# Altium PCB PCB1.PcbDoc
Units mil, origin at the board's own origin, x right, y up, seen from the top; angles counter-clockwise.
Board outline 3415.5 x 2835 mil, 2 copper layers (Top Layer, Bottom Layer); 34 components, 28 nets, 146 pads, 11 vias.
Unrouted connection lines stored in the file: 71.
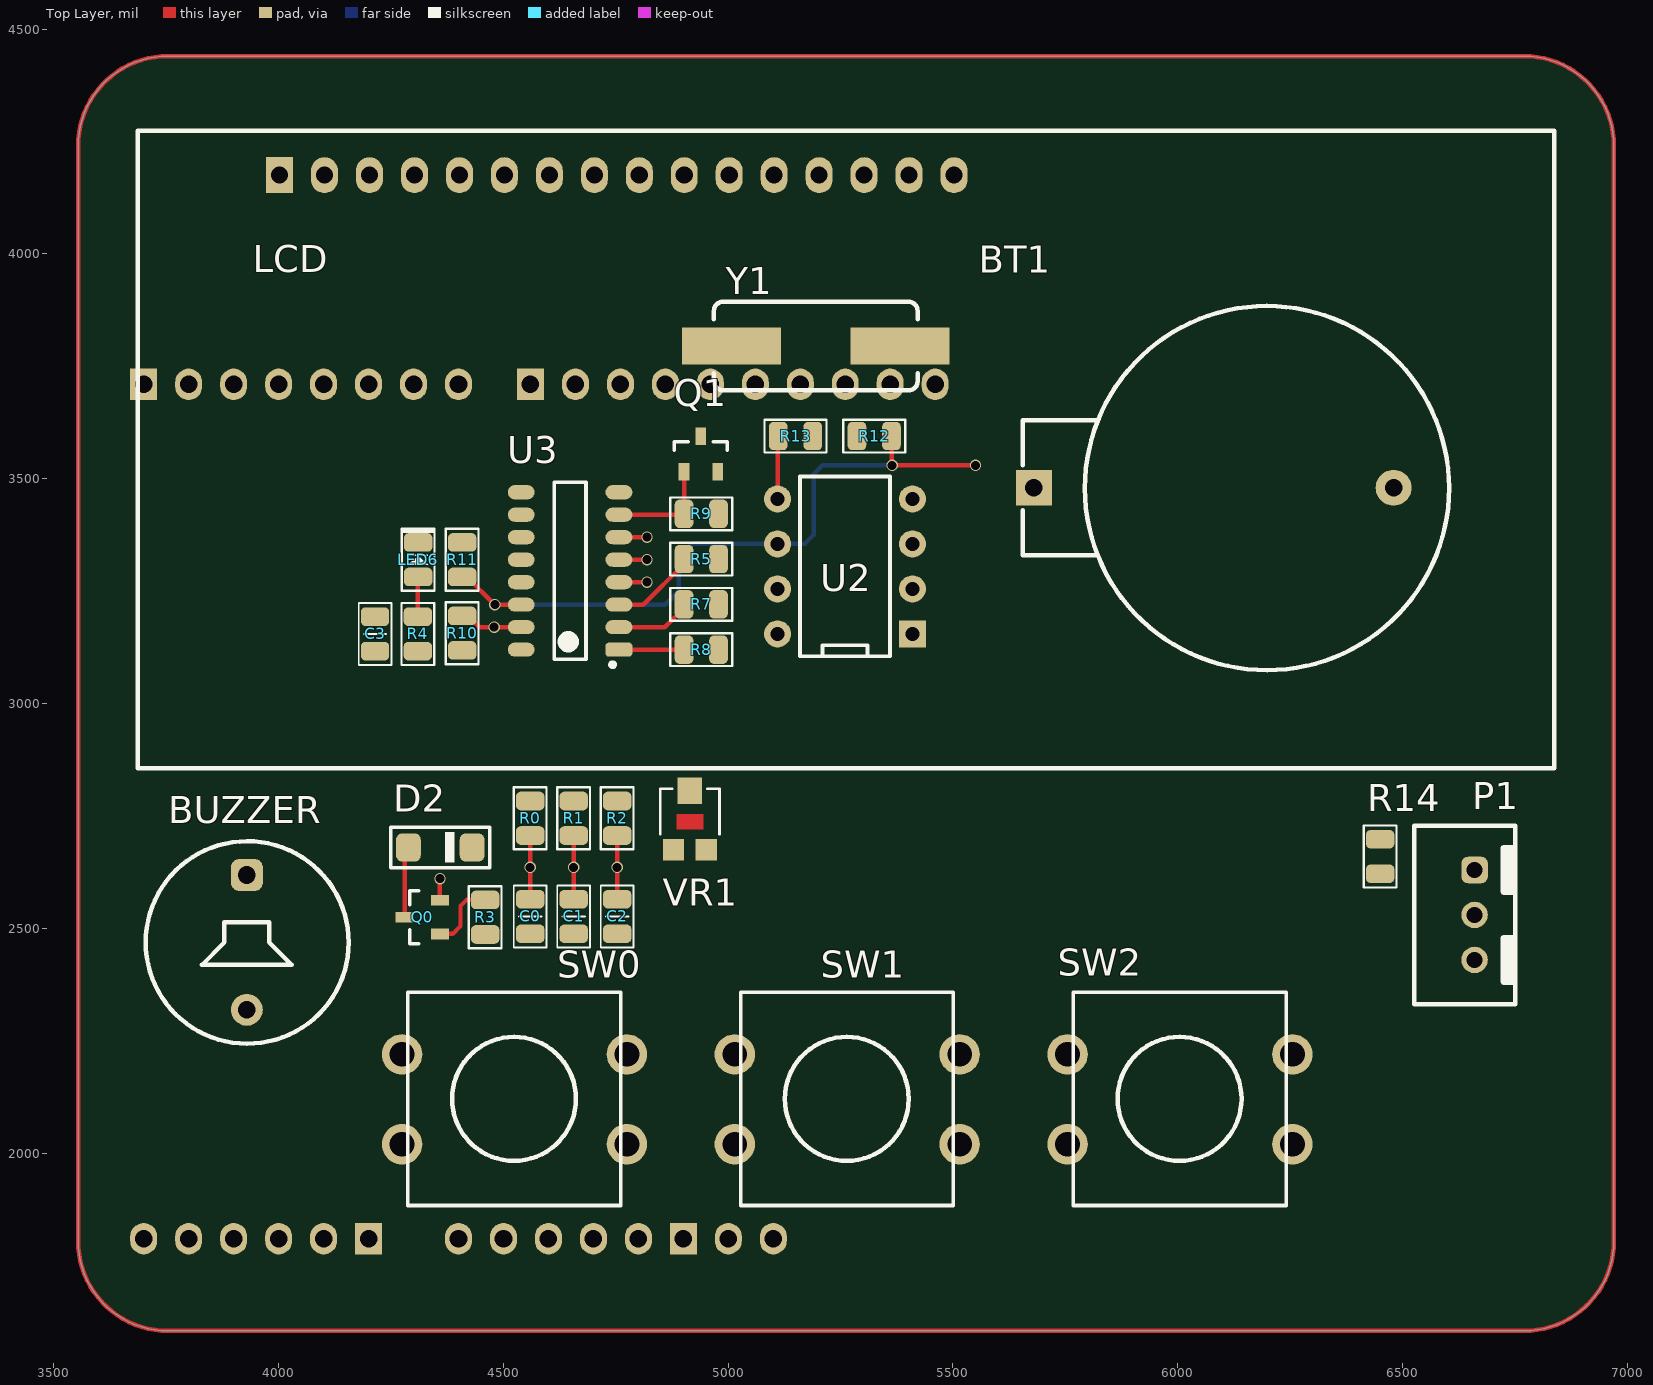
[diagram p0: Top Layer view]
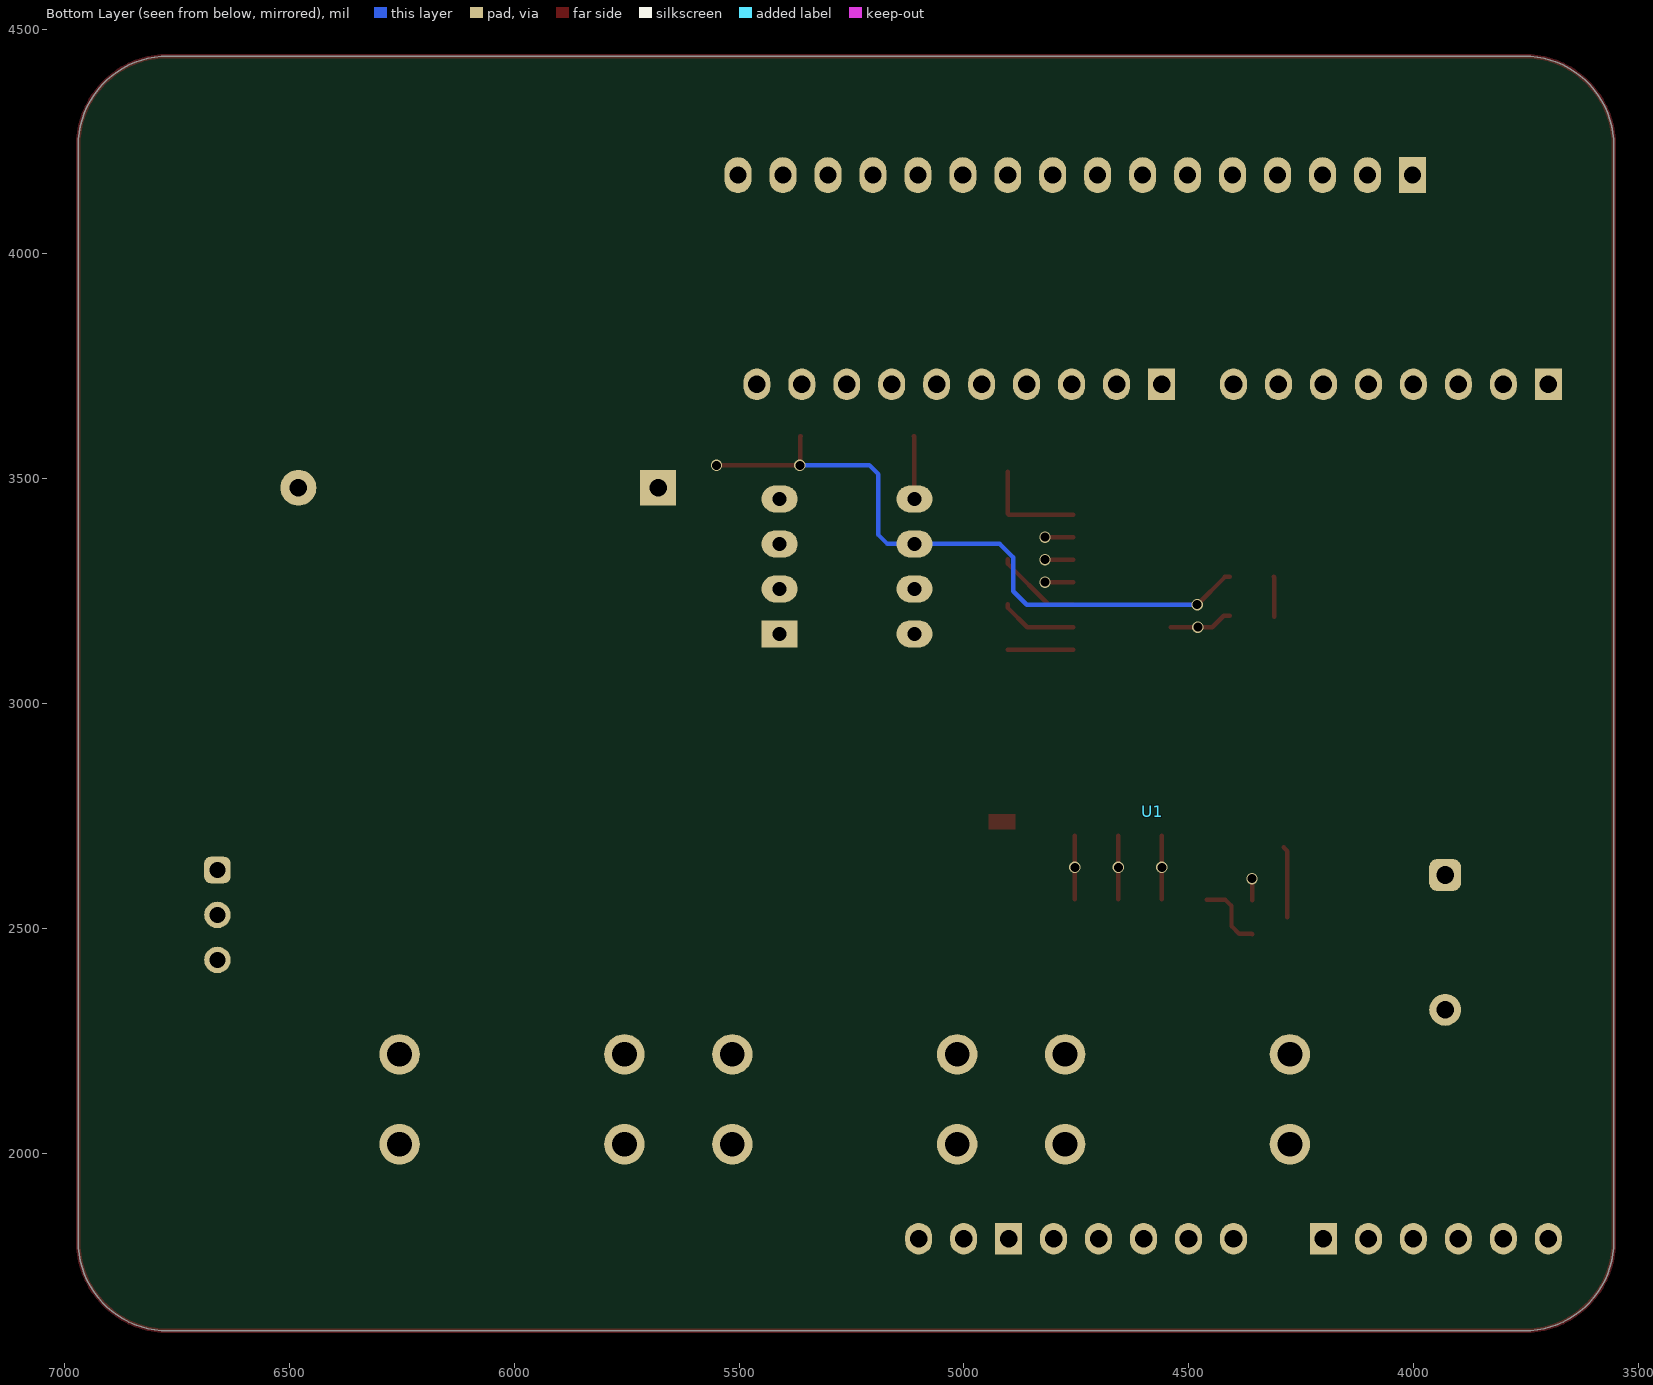
[diagram p1: Bottom Layer view, seen from below]

## Layer stack, top to bottom
Top Solder: solder mask 0.4, Solder Resist, Dk 3.5
Top Layer: signal copper 1.4
Dielectric 1: dielectric 12.6, FR-4, Dk 4.8
Bottom Layer: signal copper 1.4
Bottom Solder: solder mask 0.4, Solder Resist, Dk 3.5

## Board outline
3554.5,1805 3554.5,4240 cw(c3754.5,4240) 3754.5,4440 6770,4440 cw(c6770,4240) 6970,4240 6970,1805 cw(c6770,1805) 6770,1605 3754.5,1605 cw(c3754.5,1805)

## Design rules (kind name [scope] priority, off if disabled: settings)
Clearance [All] p1: gap=10 ignorepadtopadclearanceinfootprint=FALSE except(0: Arc-Hole Track-Hole SMDPad-Hole THPad-Hole Via-Hole Fill-Hole Poly-Hole Region-Hole Text-Hole)
DiffPairsRouting [All] p1: maxlimit=20 minlimit=20 mostfreqgap=20 toplayer_minwidth=10 toplayer_maxwidth=20 toplayer_prefwidth=15 bottomlayer_minwidth=10 bottomlayer_maxwidth=20 bottomlayer_prefwidth=15 maxuncoupledlength=500
PolygonConnect [All] p1: connectstyle=Relief reliefconductorwidth=10 reliefentries=4 polygonreliefangle="90 Angle" airgapwidth=10
RoomDefinition Sheet1 [InComponentClass('Sheet1')] p1: confinementstyle=ConfineIn formatcopy=TRUE lockcomponents=FALSE outline 0,0 2000,0 2000,1000 0,1000
RoutingVias [All] p1: holewidth=20 width=25 viastyle="Through Hole" minholewidth=20 minwidth=25 maxholewidth=20 maxwidth=25
SolderMaskExpansion [All] p1: expansion=4 istentingtop=FALSE
Width 5V [InNet('+5')] p1: maxlimit=20 minlimit=20 preferedwidth=20
Width Signal [All] p2: maxlimit=20 minlimit=10 preferedwidth=10
29 further rules are at their usual default settings.

## Components (designator, comment, footprint, x,y, rotation, side; value= is the part's Value field where it differs from the comment)
BT1 "Battery" "CON CR2032" 5780,3480 r0 top
BUZZER "Buzzer" BUZZER 3930,2618.88 r270 top
C0 "100nf" "C 0805 (2012)" 4560,2526.61 r270 top
C1 "100nf" "C 0805 (2012)" 4656.77,2526.61 r270 top
C2 "100nf" "C 0805 (2012)" 4753.54,2526.61 r270 top
C3 "1uf" "C 0805 (2012)" 4215,3155 r270 top
D2 "Diode" SOD-80 4360,2680 r0 top
LCD "LCD 16x2" "LCD 16x2" 4002.56,4175 r0 top
LED6 "Led" "Led SMD 0805" 4310.79,3320 r270 top
P1 "DHT" XH2.54-3P 6660,2430 r270 top
Q0 "Transistor NPN" SOT-23 4320,2525 r180 top
Q1 "Transistor NPN" SOT-23 4939.45,3555 r90 top
R0 "10k" "R 0805 (2012)" 4560,2745 r90 top
R1 "10k" "R 0805 (2012)" 4656.77,2745 r90 top
R2 "10k" "R 0805 (2012)" 4753.54,2745 r90 top
R3 "4.7k" "R 0805 (2012)" 4460,2525 r90 top
R4 "1k" "R 0805 (2012)" 4310,3155 r270 top
R5 "10k" "R 0805 (2012)" 4940.43,3321.35 r0 top
R7 "10k" "R 0805 (2012)" 4940.43,3220.68 r0 top
R8 "10k" "R 0805 (2012)" 4940.43,3120 r0 top
R9 "4.7k" "R 0805 (2012)" 4940.43,3422.03 r0 top
R10 "4.7k" "R 0805 (2012)" 4408.82,3156.61 r270 top
R11 "4.7k" "R 0805 (2012)" 4408.82,3320 r90 top
R12 "4.7k" "R 0805 (2012)" 5325,3595 r180 top
R13 "4.7k" "R 0805 (2012)" 5150,3595 r0 top
R14 "4.7k" "R 0805 (2012)" 6450,2660 r270 top
SW0 "Tact Switch" "SW/4/DIP 12x12x7" 4775,2220 r180 top
SW1 "Tact Switch" "SW/4/DIP 12x12x7" 5515,2220 r180 top
SW2 "Tact Switch" "SW/4/DIP 12x12x7" 6255,2220 r180 top
U1 "STM32F103RBT6 Shield" "Arduino Uno R3 Shield 2xPins" 4900.6,1810 r90 bottom
U2 "DS1307" "DIP 8" 5410,3155 r90 top
U3 "PCF8574" SOIC-16 4648.66,3295 r180 top
VR1 "5k" "R Var 3mm" 4915,2745 r0 top
Y1 "Crystal" "Crystal HC49US SMD" 5195,3795 r180 top

## Footprints (in the part's own frame and the unit in brackets; to place one, negate y for a bottom-side part, rotate by r counter-clockwise, add the part's x,y. Pads: shape width x height; smd on the part's side, far side on the other; paste and mask are expansions set on the pad)
"Arduino Uno R3 Shield 2xPins" [mil]
  rect 70x60 / inner round 60 / far side rect 70x60 hole 39: 1(0,0) 7(0,-700) 13(1900,-1200) 21(1900,-340)
  oval 70x60 / inner round 60 / far side oval 70x60 hole 39: 2(0,-100) 3(0,-200) 4(0,-300) 5(0,-400) 6(0,-500) 8(0,-800) 9(0,-900) 10(0,-1000) 11(0,-1100) 12(0,-1200) 14(1900,-1100) 15(1900,-1000) 16(1900,-900) 17(1900,-800) 18(1900,-700) 19(1900,-600) 20(1900,-500) 22(1900,-240) 23(1900,-140) 24(1900,-40) 25(1900,60) 26(1900,160) 27(1900,260) 28(1900,360) 29(1900,460) 30(1900,560) 31(0,200) 32(0,100)
BUZZER [mm] "DC Buzzer 5V/12V"
  rrect50% 1.8x1.8 hole 1: 1(0,0)
  round 1.8 hole 1: 2(7.62,0)
  silkscreen extent -1.91,-5.71 9.53,5.75, body extent -5.64,-6 9.81,6, height 9.65
"C 0805 (2012)" [mm] "Chip Capacitor, 2-Leads, Body 2.0x1.3mm, IPC Medium Density"
  rrect50% 1.05x1.6 smd: 1(-0.975,0) 2(0.975,0)
  silkscreen extent -1.75,-0.92 1.75,0.92, body extent -1,-0.62 1,0.63, height 0.6
"CON CR2032" [mil]
  rect 80x80 / inner round 60 / far side rect 80x80 hole 39: 1(-100,0)
  round 80 / inner round 60 / far side round 80 hole 39: 2(700,0)
  silkscreen extent -125,-406 823,404, body extent -232,-448 898,448, height 279
"Crystal HC49US SMD" [mil]
  rect 220.47x82.67 smd: 1(-187,0) 2(187,0)
  silkscreen extent -226,-98 226,98, body extent -250,-93 250,92, height 165
"DIP 8" [mil] "DIP IC (2.54mm), 8 pins"
  rect 60x60 / inner round 60 / far side rect 60x80 hole 31: 1(0,0)
  round 60 / inner round 60 / far side oval 60x80 hole 31: 2(100,0) 3(200,0) 4(300,0) 5(300,300) 6(200,300) 7(100,300) 8(0,300)
  silkscreen extent -50,50 350,250, body extent -47,-15 347,310, height 201
"LCD 16x2" [mil]
  rect 60x80 / inner round 60 / far side rect 60x80 hole 38: 1(0,0)
  oval 60x80 / inner round 60 / far side oval 60x80 hole 38: 2(100,0) 3(200,0) 4(300,0) 5(400,0) 6(500,0) 7(600,0) 8(700,0) 9(800,0) 10(900,0) 11(1000,0) 12(1100,0) 13(1200,0) 14(1300,0) 15(1400,0) 16(1500,0)
  round 0 all layers, no hole: HOLE(-216.54,0) HOLF(2736.22,0) HOLH(-216.54,-1220.47) ""(2736.22,-1220.47)
  silkscreen extent -315,-1319 2835,98, body extent -314,-1318 2845,100, height 710
"Led SMD 0805" [mm] "Led SMD 0805"
  rrect50% 1.05x1.6 smd: 1(-0.975,0) 2(0.975,0)
  silkscreen extent -1.75,-0.93 1.75,0.92, body extent -1.01,-0.63 1.01,0.62, height 1.1
"R 0805 (2012)" [mm] "Chip Resistor, 2-Leads, Body 2.0x1.3mm, IPC Medium Density"
  rrect50% 1.05x1.6 smd: 1(-0.975,0) 2(0.975,0)
  silkscreen extent -1.75,-0.92 1.75,0.92, body extent -1,-0.61 1,0.59, height 0.5
"R Var 3mm" [mm]
  rect 1.2x1.2 smd: 1(-0.925,-1.775) 3(0.925,-1.775)
  rect 1.4x1.5 smd: 2(0,1.55)
  Top Layer region: -0.76,-0.635 0.764,-0.635 0.764,0.254 -0.76,0.254
  silkscreen extent -1.68,-0.9 1.68,1.68, body extent -1.55,-1.85 1.55,1.84, height 1.95
SOD-80 [mm] "SOD-80 MiniMelf Diod case LL4148 3.7x1.6x0.5mm"
  rrect50% 1.4x1.6 smd: 1(1.8,0) 2(-1.8,0)
  silkscreen extent -2.79,-1.14 2.79,1.14, body extent -1.8,-0.74 1.8,0.76, height 1.5
SOIC-16 [mm] "SOIC, 16-Leads, Body 10.0x4.0mm (max), Pitch 1.27mm, IPC Medium Density"
  rrect50% 1.52x0.8 smd: 1(-2.76,4.445)
  oval 1.52x0.8 smd: 2(-2.76,3.175) 3(-2.76,1.905) 4(-2.76,0.635) 5(-2.76,-0.635) 6(-2.76,-1.905) 7(-2.76,-3.175) 8(-2.76,-4.445) 9(2.76,-4.445) 10(2.76,-3.175) 11(2.76,-1.905) 12(2.76,-0.635) 13(2.76,0.635) 14(2.76,1.905) 15(2.76,3.175) 16(2.76,4.445)
  silkscreen extent -2.53,-5 0.9,5.42, body extent -3,-4.95 3,4.95, height 1.4
SOT-23 [mm] "SOT23, 3-Leads, Body 3.0x2.5mm (max), Pitch 0.95mm, IPC Medium Density"
  rect 1x0.6 smd: 1(-1,0.95) 2(-1,-0.95) 3(1,0)
  silkscreen extent 0.2,-1.5 0.7,1.5, body extent -1.28,-1.46 1.27,1.46, height 0.95
"SW/4/DIP 12x12x7" [mil]
  round 90 hole 55: 1(0,0) 2(0,200) 3(500,200) 4(500,0)
  silkscreen extent 14,-138 487,336, body extent -11,-137 511,335, height 309
XH2.54-3P [mm]
  rrect50% 1.5x1.5 hole 0.9: 1(-5.08,0)
  round 1.5 hole 0.9: 2(-2.54,0) 3(0,0)
  silkscreen extent -7.58,-3.4 2.5,2.4, body extent -7.42,-3.4 2.34,2.44, height 7.21

## Part data
C0 C1 C2 C3: library part "Capacitor NP", "Capacitor non-pol"
D2: "Default Diode", Code_JEDEC=DO-214-AB, LatestRevisionDate=17-Jul-2002, LatestRevisionNote="Re-released for DXP Platform.", PackageReference=SMC, PackageVersion=Sep-1996, Published=8-Jun-2000, Publisher="Altium Limited"
LCD: "Character LCD 16x2"
LED6: "Typical LED"
P1: library part "Header 3", "Header, 3-Pin"
Q0 Q1: "NPN Bipolar Transistor"
R0 R1 R2 R3 R4 R5 R7 R8 R9 R10 R11 R12 R13 R14: library part Resistor, "Resistor", LatestRevisionDate=17-Jul-2002, LatestRevisionNote="Re-released for DXP Platform.", PackageReference=AXIAL-0.3, Published=8-Jun-2000, Publisher="Altium Limited"
SW0 SW1 SW2: library part "SW SPST-4", "Tact switch 4 pin"
U1: library part "Arduino Uno R3 shield", "Arduino Uno R3 shield pins connection"
U3: "Remote 8-Bit I/O Expander for I  2C Bus"
VR1: library part "Resistor Variable", "Resistor Variable"

## Via types
v1: diameter 25, hole 20, Top Layer to Bottom Layer, 11 vias

## Nets (pads, with @x,y where several pads share a name; then routed paths per layer and width w, separated by ;. In a path a pad name is that pad's centre, name@x,y a point inside that pad or via, vN(x,y) a via of type N, cw(c..) or ccw(c..) an arc to the next point about the centre after c; other vN are vias at no path point)
+5: BUZZER.1 C3.2 D2.1 LCD.2 P1.1 R0.2 R1.2 R2.2 R4.2 R5.2 R7.2 R8.2 R9.2 R10.2 R11.2 R12.2 R13.2 R14.1 U1.3 U2.8 U3.16 VR1.1
"BUTTON 0": C0.1 R0.1 SW0.1 SW0.4 U1.13 | length 141.6
  Top Layer w10: C0.1 v1(4560,2635.81) R0.1
"BUTTON 1": C1.1 R1.1 SW1.1 SW1.4 U1.14 | length 141.6
  Top Layer w10: C1.1 v1(4656.77,2635.81) R1.1
"BUTTON 2": C2.1 R2.1 SW2.1 SW2.4 U1.15 | length 141.6
  Top Layer w10: C2.1 v1(4753.54,2635.81) R2.1
BUZZER: R3.1 U1.20
DHT_INPUT: P1.2 R14.2 U1.17
GND: BT1.2 C0.2 C1.2 C2.2 C3.1 LCD.1 LCD.16 LED6.1 P1.3 Q0.2 Q1.2 SW0.2 SW0.3 SW1.2 SW1.3 SW2.2 SW2.3 U1.4 U1.5 U1.27 U2.4 U3.8 VR1.3 | length 48.2
  Top Layer w10: Q0.2 v1(4359.37,2610.63)
NetBT1_1: BT1.1 U2.3
NetBUZZER_2: BUZZER.2 D2.2 Q0.3 | length 158.5
  Top Layer w10: Q0.3 4280.63,2671.5 D2.2
NetLCD_3: LCD.3 VR1.2
NetLCD_4: LCD.4 U3.4 | length 62.7
  Top Layer w10: U3.4 v1(4820,3270)
NetLCD_5: LCD.5 U3.5 | length 62.7
  Top Layer w10: U3.5 v1(4820,3320)
NetLCD_6: LCD.6 U3.6 | length 62.7
  Top Layer w10: U3.6 v1(4820,3370)
NetLCD_11: LCD.11 U3.9
NetLCD_12: LCD.12 U3.10
NetLCD_13: LCD.13 U3.11
NetLCD_14: LCD.14 U3.12
NetLCD_15: LCD.15 Q1.3
NetLED6_2: LED6.2 R4.1 | length 88.6
  Top Layer w10: R4.1 4310.39,3193.78 4310.39,3281.22 LED6.2
NetQ0_1: Q0.1 R3.2 | length 158.2
  Top Layer w10: Q0.1 4360.24,2488.47 4388.2,2488.47 4405,2505.27 4405,2550 4418.39,2563.39 R3.2
NetQ1_1: Q1.1 R9.1 U3.7 | length 239.2
  Top Layer w10: U3.7 4900.02,3420 R9.1 Q1.1
NetR5_1: R5.1 U3.3 | length 193
  Top Layer w10: U3.3 4811.52,3220 4902.05,3310.53 R5.1
NetR7_1: R7.1 U3.2 | length 170.4
  Top Layer w10: U3.2 4859.31,3170 4902.05,3212.74 R7.1
NetR8_1: R8.1 U3.1 | length 144.7
  Top Layer w10: U3.1 R8.1
NetU2_1: U2.1 Y1.2
NetU2_2: U2.2 Y1.1
SCL: R11.1 R12.1 U1.30 U2.6 U3.14 | length 1542.5
  Top Layer w10: R11.1 4419.65,3281.61 v1(4481.26,3220) U3.14 ; R12.1 5364.19,3594.19 5364.19,3530.81 v1(5365,3530) v1(5550,3530)
  Bottom Layer w10: v1(4481.26,3220) 4860,3220 4890,3250 4890,3325 4920,3355 U2.6 5170,3355 5190,3375 5190,3510 5210,3530 v1(5365,3530)
SDA: R10.1 R13.1 U1.29 U2.5 U3.15 | length 251
  Top Layer w10: R10.1 4422.53,3195 4447.53,3170 v1(4480,3170) U3.15 ; 5110.81,3485.86 5110.81,3594.19 R13.1
pads on no net: LCD. LCD.7 LCD.8 LCD.9 LCD.10 LCD.HOLE LCD.HOLF LCD.HOLH U1.1 U1.2 U1.6 U1.7 U1.8 U1.9 U1.10 U1.11 U1.12 U1.16 U1.18 U1.19 U1.21 U1.22 U1.23 U1.24 U1.25 U1.26 U1.28 U1.31 U1.32 U2.7 U3.13
copper on no net: | length 12157.6
  Top Layer w10: 3554.5,1805 ccw(c3754.5,1805) 3754.5,1605 6770,1605 ccw(c6770,1805) 6970,1805 6970,4240 ccw(c6770,4240) 6770,4440 3754.5,4440 ccw(c3754.5,4240) 3554.5,4240 3554.5,1805

## Dimensions
6837.2,4273.43 to 6970,4240 on Top Layer
3554.5,4240 to 3687.6,4273.43 on Top Layer
3554.5,4240 to 6970,4240 on Top Layer